# Altium PCB SLAVE.PcbDoc
Units mm, origin at the board's own origin, x right, y up, seen from the top; angles counter-clockwise.
Board outline 72.82 x 68.97 mm, 2 copper layers (Top Layer, Bottom Layer); 59 components, 52 nets, 222 pads, 42 vias.
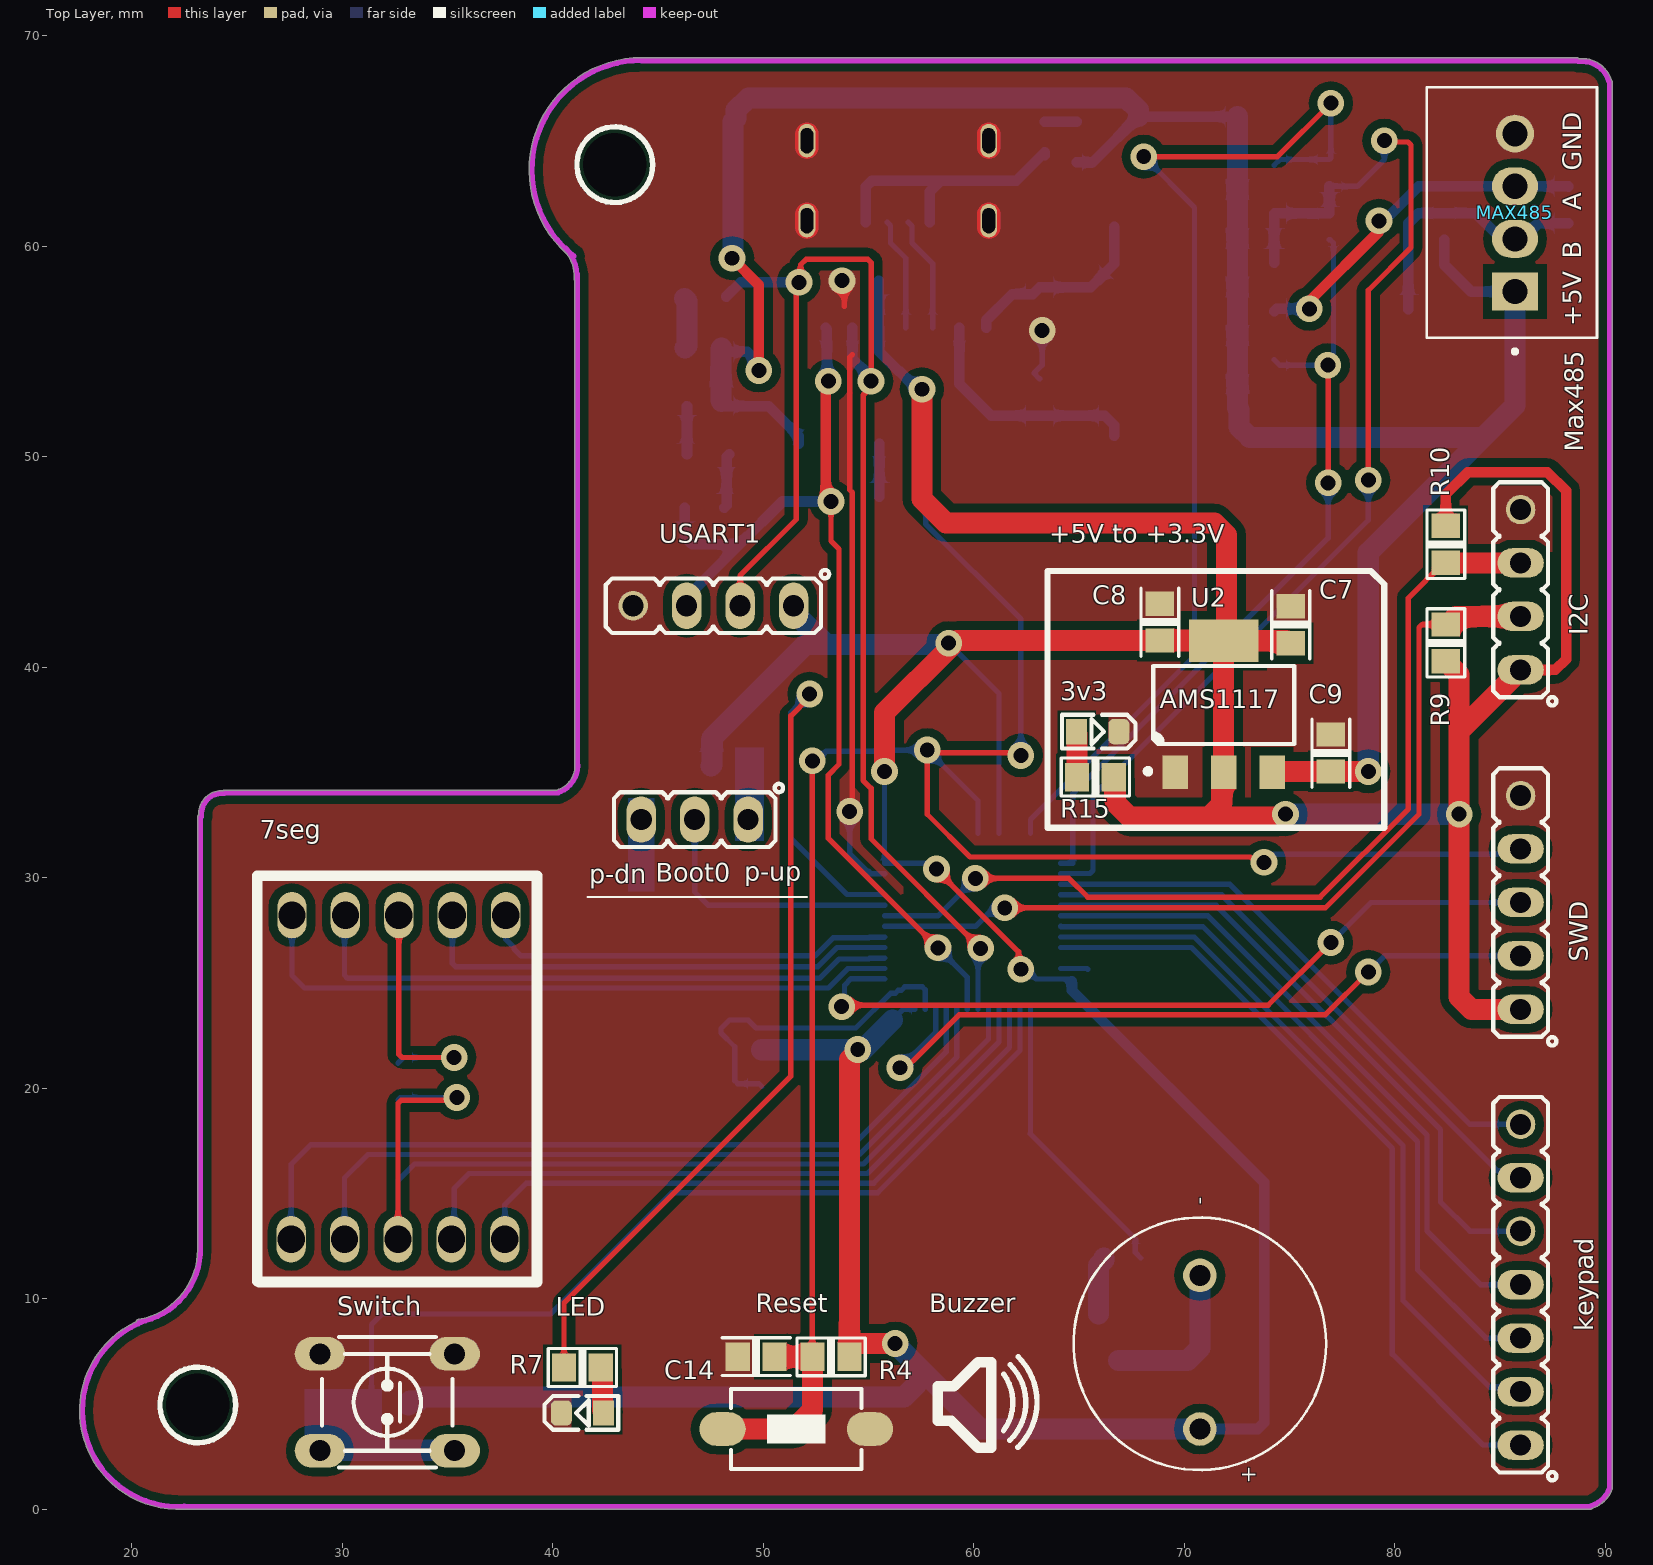
[diagram p0: Top Layer view]
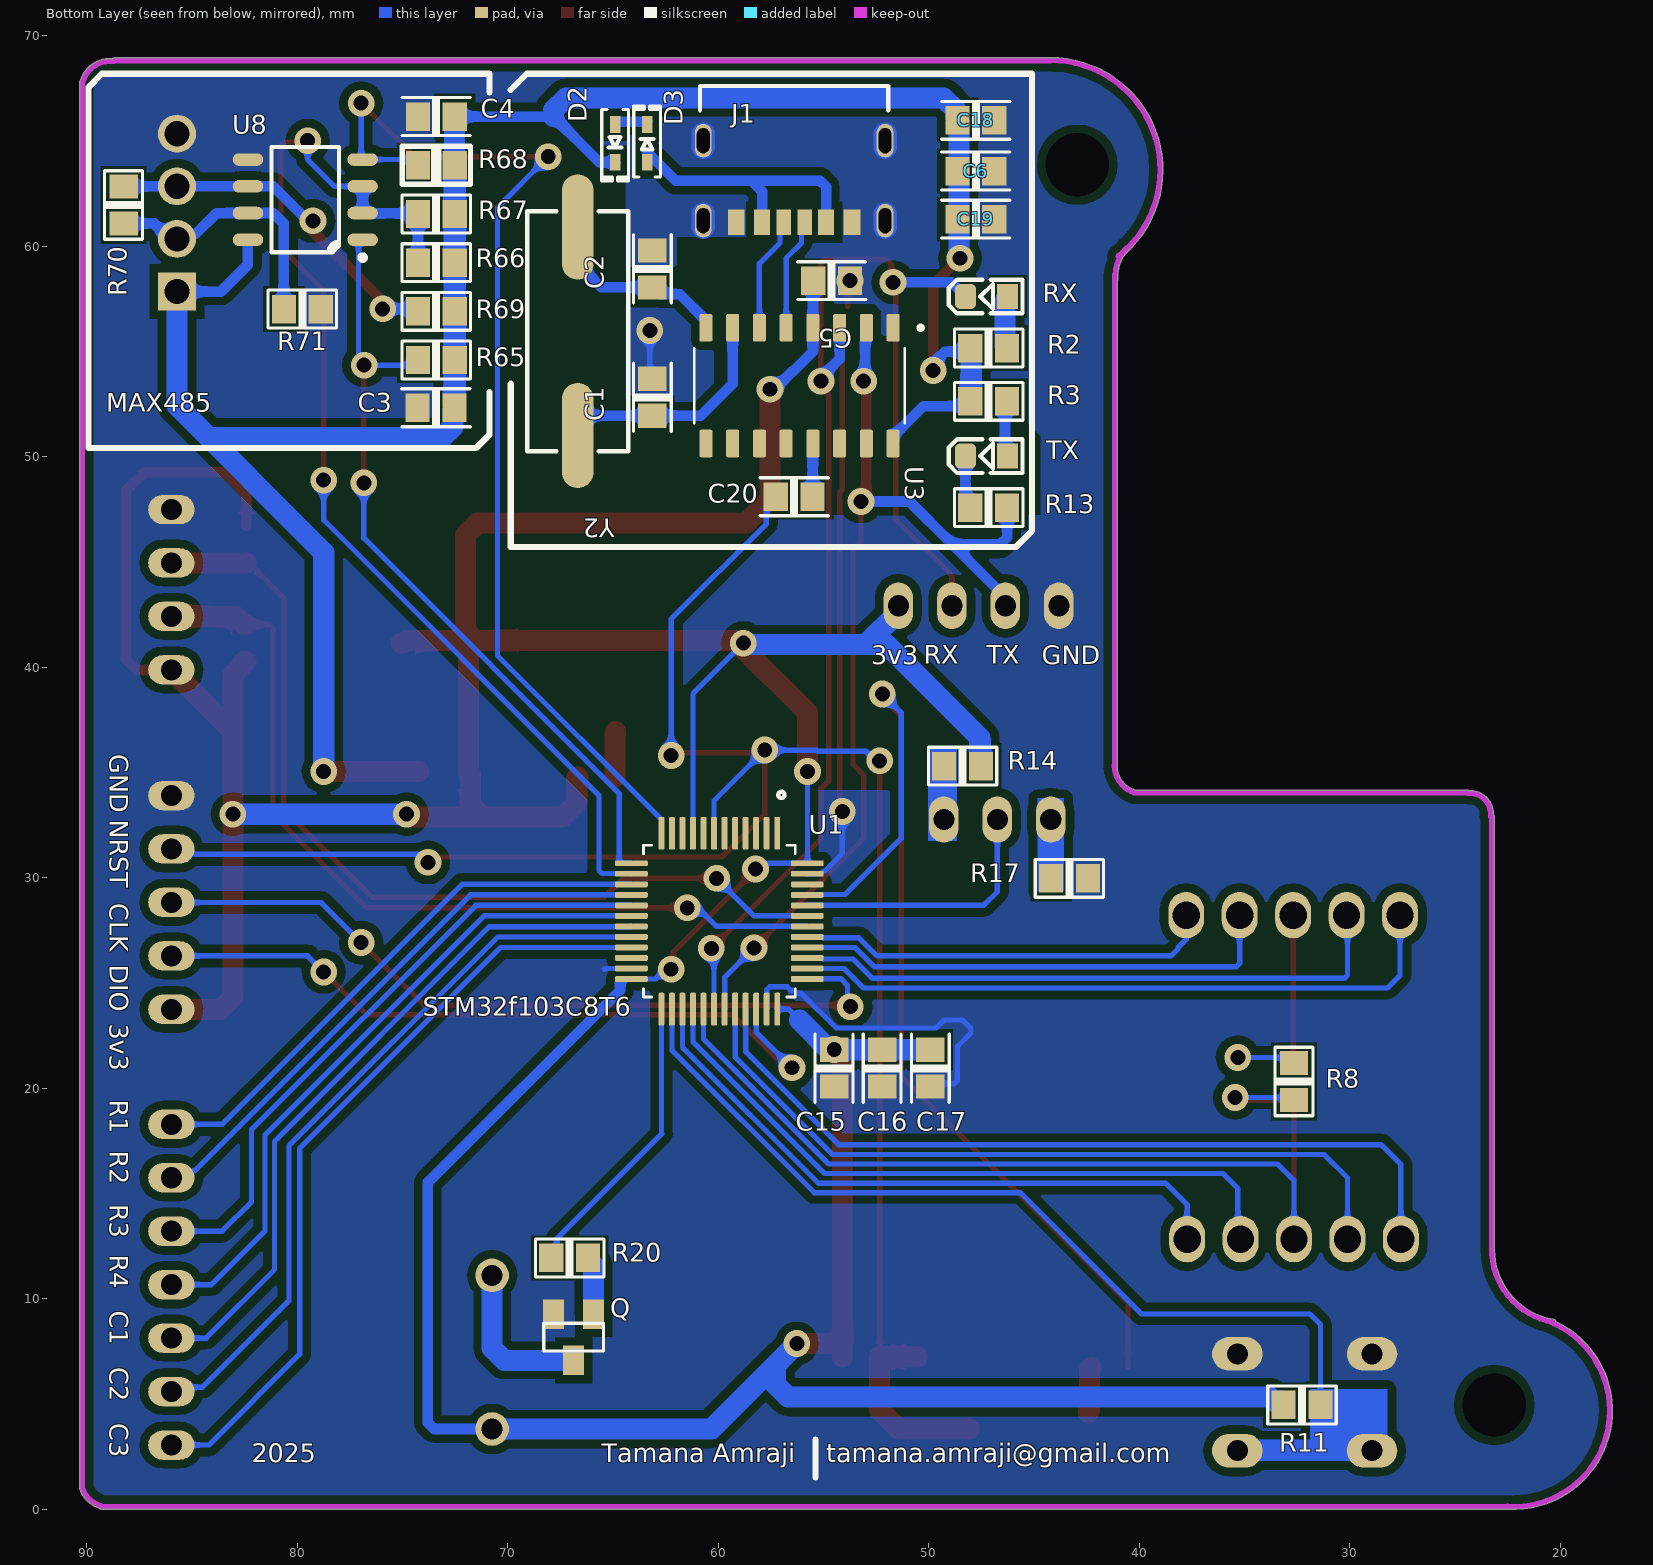
[diagram p1: Bottom Layer view, seen from below]
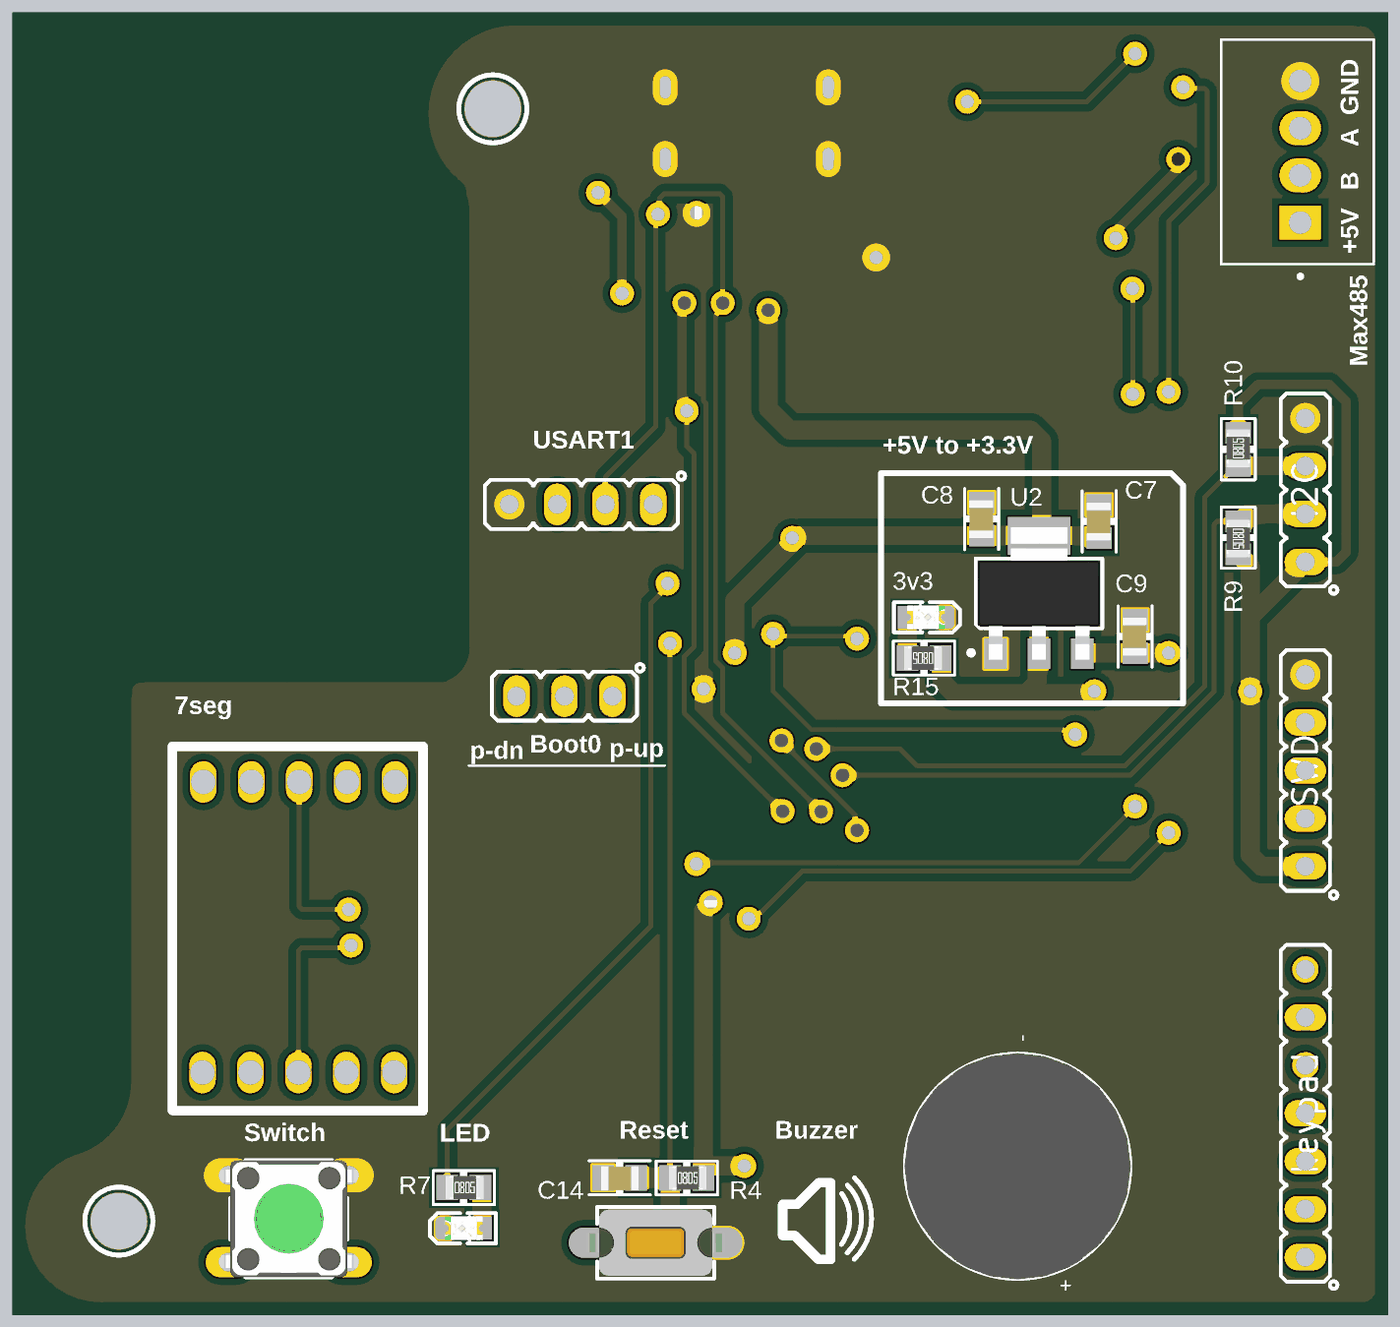
[diagram p2: 3D render of the assembled board from above, using the file's embedded part models]
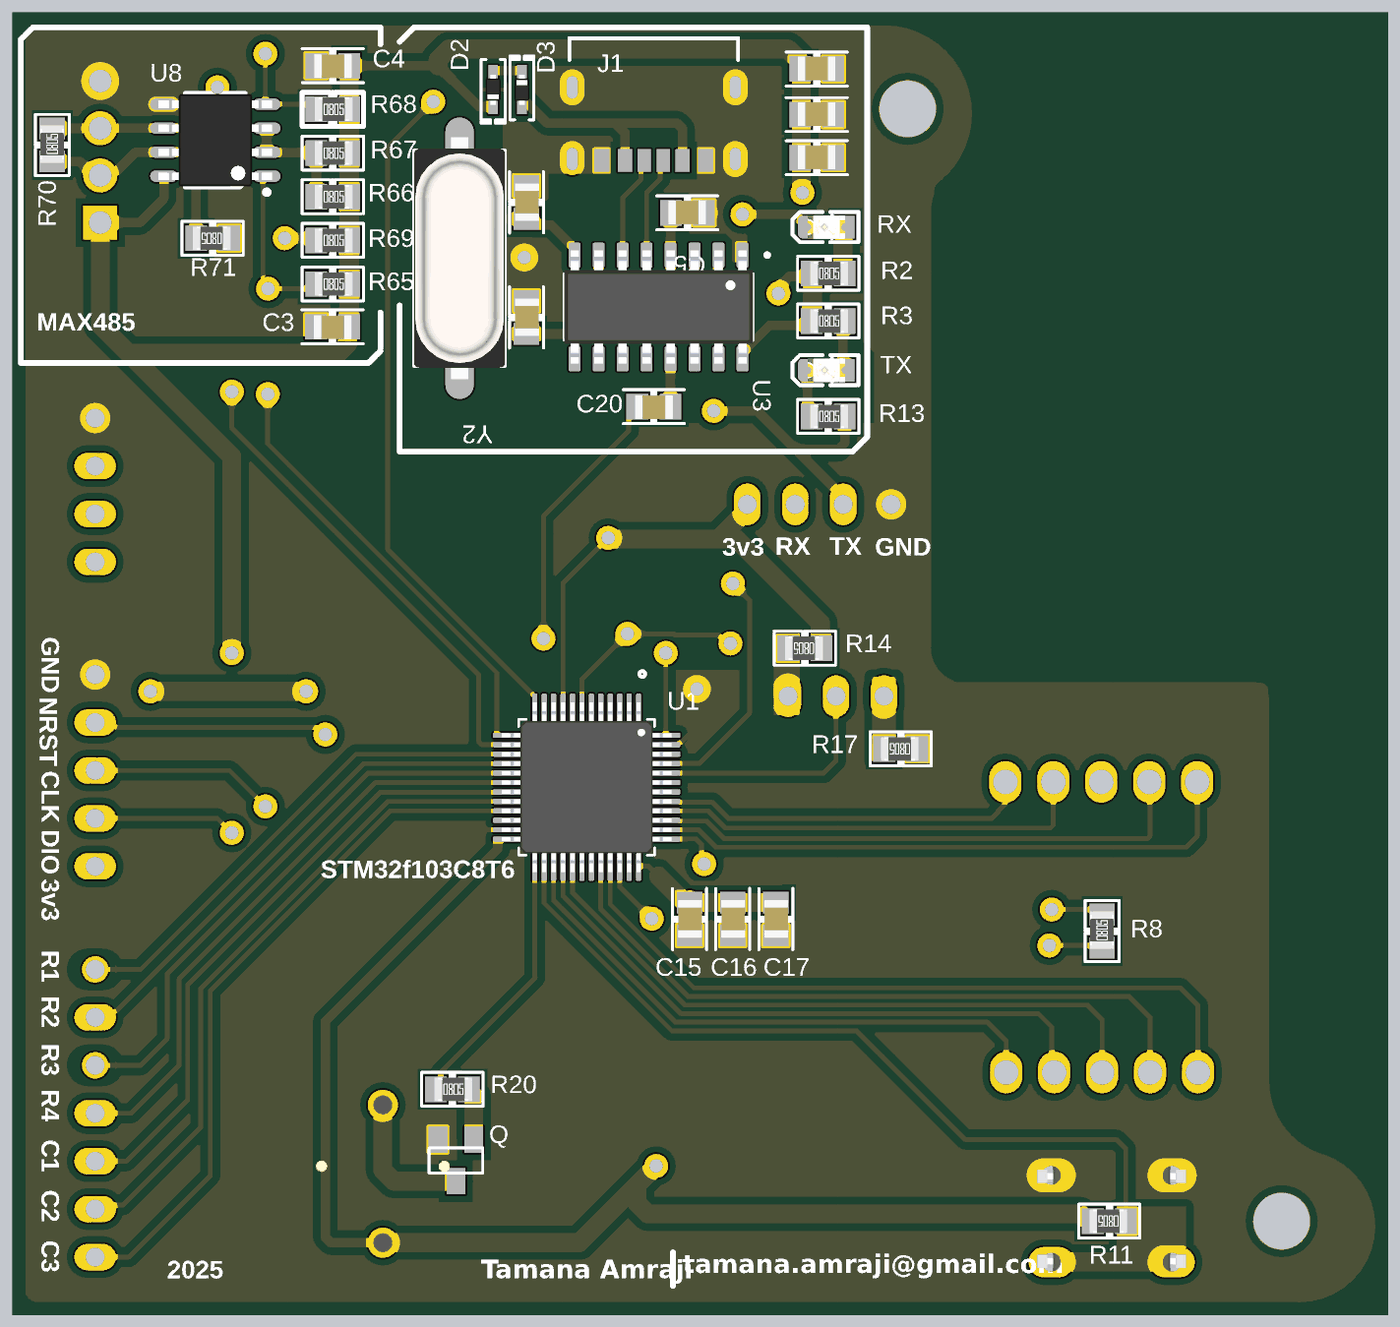
[diagram p3: 3D render of the assembled board from below, using the file's embedded part models]

## Layer stack, top to bottom
Top Solder: solder mask 0.0102, Solder Resist, Dk 3.5
Top Layer: signal copper 0.0356
Dielectric 1: dielectric 0.32, FR-4, Dk 4.8
Bottom Layer: signal copper 0.0356
Bottom Solder: solder mask 0.0102, Solder Resist, Dk 3.5

## Board outline
20.201,8.915 ccw(c22.193,4.679) 22.442,0.005 ccw(c22.479,0.127) 22.479,0 89.295,0 ccw(c89.295,0.127) 89.396,0.05 ccw(c88.941,1.445) 90.329,0.966 ccw(c90.208,1.008) 90.336,1.008 90.336,67.794 ccw(c90.208,67.794) 90.297,67.885 ccw(c88.893,67.457) 88.749,68.918 ccw(c88.66,68.827) 88.66,68.955 44.272,68.955 ccw(c44.218,68.839) 44.219,68.966 ccw(c44.208,63.632) 40.66,59.648 cw(c39.152,58.538) 41.024,58.538 cw(c39.152,58.538) 41.021,58.428 ccw(c41.148,58.42) 41.034,58.362 41.034,35.498 ccw(c41.162,35.498) 41.036,35.481 cw(c39.832,35.327) 41.045,35.327 cw(c39.832,35.327) 40.175,34.164 24.39,34.164 ccw(c24.39,34.036) 24.319,34.142 ccw(c24.281,33.03) 23.169,32.987 ccw(c23.255,32.893) 23.127,32.893 23.127,12.49 ccw(c23.246,12.442) 23.118,12.439 cw(c19.747,12.343) 23.12,12.343 cw(c19.747,12.343) 20.61,9.082 ccw(c20.636,8.958) 20.598,9.079 cw(c19.747,12.343) 20.306,9.017 ccw(c20.327,8.891)

## Design rules (kind name [scope] priority, off if disabled: settings)
Clearance [All] p1: gap=0.4 ignorepadtopadclearanceinfootprint=TRUE except(0: Arc-Hole Track-Hole SMDPad-Hole THPad-Hole Via-Hole Fill-Hole Text-Hole; 0.1: Arc-Track Arc-SMDPad Track-Track Track-SMDPad SMDPad-SMDPad; 0.2: Arc-Arc Arc-THPad Track-THPad; 0.254: Arc-Via Arc-Text Track-Via Track-Text SMDPad-THPad SMDPad-Via SMDPad-Text THPad-THPad THPad-Via THPad-Text Via-Via Via-Text Fill-Text Poly-Text Region-Text Text-Text)
HoleSize [All] p1: absolutevalues=TRUE maxlimit=5 minlimit=0.025 maxpercent=80.000 minpercent=20.000
MinimumSolderMaskSliver [Not HasFootprint('QFP50P900X900X160-48N') And  Not HasFootprint('GCT_USB4125-GF-A_REVA2') vs Not HasFootprint('QFP50P900X900X160-48N') And  Not HasFootprint('GCT_USB4125-GF-A_REVA2')] p1: minsoldermaskwidth=0.254
PolygonConnect [All] p1: connectstyle=Direct reliefconductorwidth=0.254 reliefentries=4 polygonreliefangle="90 Angle" airgapwidth=0.254
RoomDefinition Buzzer [InComponentClass('Buzzer')] p1: confinementstyle=ConfineIn formatcopy=TRUE lockcomponents=FALSE outline 63.119,0.445 78.232,0.445 78.232,15.177 63.119,15.177
RoomDefinition "Supply 5V to 3V3- Ams1117" [InComponentClass('Supply 5V to 3V3- Ams1117')] p2: confinementstyle=ConfineIn formatcopy=TRUE lockcomponents=FALSE outline 78.73,32.117 78.73,44.563 63.49,44.563 63.49,32.117
RoomDefinition CH340G [InComponentClass('CH340G')] p3: confinementstyle=ConfineIn formatcopy=TRUE lockcomponents=FALSE outline 44.831,46.189 70.485,46.189 70.485,68.531 44.831,68.531
RoomDefinition MAX485 [InComponentClass('MAX485')] p4: confinementstyle=ConfineIn formatcopy=TRUE lockcomponents=FALSE outline 90.17,50.79 90.17,68.49 71.106,68.49 71.106,50.79
RoutingVias [All] p1: holewidth=0.711 width=1.27 viastyle="Through Hole" minholewidth=0.711 minwidth=1.27 maxholewidth=0.711 maxwidth=1.27
SilkToSolderMaskClearance [All] p1 off: minsilkscreentomaskgap=0.1 clearancetoexposedcopper=TRUE
SolderMaskExpansion [All] p1: expansion=0.102 istentingtop=FALSE
Width [All] p1: maxlimit=1 minlimit=0.254 preferedwidth=0.5 minimp=50.000000 maximp=50.000000 favimp=50.000000
27 further rules are at their usual default settings.

## Classes and differential pairs
component class Slave_Micro: 7seg Boot0 C14 C15 C16 C17 I2C keypad LED R4 R7 R8 R9 R10 R11 R14 R17 Reset SWD Switch U1 USART1
component class Buzzer: Buzzer Q R20
component class "Supply 5V to 3V3- Ams1117": 3v3 C7 C8 C9 R15 U2
component class MAX485: C3 C4 MAX485 R65 R66 R67 R68 R69 R70 R71 U8
component class CH340G: C1 C2 C5 C6 C18 C19 C20 D2 D3 J1 R2 R3 R13 RX TX U3 Y2

## Components (designator, comment, footprint, x,y, rotation, side; value= is the part's Value field where it differs from the comment)
3v3 "LED SMD 0805 GREEN" LED_0805_GREEN 65.887,36.943 r0 top
7seg "7seg" "7seg 12x19" 22.733,9.525 r0 top
Boot0 "HDRM3" HDR_1X3 46.736,32.766 r180 top
Buzzer "CEM-1203(42)" CUI_CEM-1203(42) 70.739,7.86 r90 top
C1 "22pF" "CAP 0805_2012" 63.119,52.832 r90 bottom value=100nF
C2 "22pF" "CAP 0805_2012" 63.119,58.928 r90 bottom value=100nF
C3 "10uF" "CAP 0805_2012" 73.406,52.324 r180 bottom
C4 "100nF" "CAP 0805_2012" 73.392,66.157 r180 bottom
C5 "100nF" "CAP 0805_2012" 54.61,58.381 r0 bottom
C6 "10uF" "CAP 0805_2012" 47.752,63.588 r0 bottom value=100nF
C7 "10uF" "CAP 0805_2012" 75.047,42.023 r270 top
C8 "100nF" "CAP 0805_2012" 68.824,42.15 r270 top
C9 "10uF" "CAP 0805_2012" 76.952,35.927 r270 top
C14 "100nF" "CAP 0805_2012" 49.657,7.239 r0 top
C15 "100nF" "CAP 0805_2012" 54.483,20.955 r90 bottom
C16 "100nF" "CAP 0805_2012" 52.197,20.955 r90 bottom
C17 "100nF" "CAP 0805_2012" 49.911,20.955 r90 bottom
C18 "100nF" "CAP 0805_2012" 47.752,66.001 r0 bottom
C19 "100nF" "CAP 0805_2012" 47.752,61.302 r0 bottom
C20 "100nF" "CAP 0805_2012" 56.388,48.094 r180 bottom
D2 "1N4148" SOD-523F 64.897,64.897 r270 bottom
D3 "1N4148" SOD-523F 63.373,64.897 r90 bottom
I2C "HDR1X4" HDR_1X4 85.979,43.688 r90 top value=HDRM4
J1 "USB4125-GF-A_REVA2" GCT_USB4125-GF-A_REVA2 56.388,64.223 r0 bottom
keypad "HDR1X7" HDR_1X7 85.979,10.668 r90 top value=HDRM7
LED "LED SMD 0805 GREEN" LED_0805_GREEN 41.402,4.572 r180 top
MAX485 "phoenix 2.54" PHOENIX_1881574 89.611,55.655 r90 top
Q "MMBT2222A" SOT23 66.868,8.171 r0 bottom
R2 "1.5k" "RES 0805_2012" 47.145,55.167 r180 bottom value=1K
R3 "1.5k" "RES 0805_2012" 47.145,52.64 r180 bottom value=1K
R4 "10K" "RES 0805_2012" 53.213,7.239 r0 top value=1K
R7 "330" "RES 0805_2012" 41.402,6.731 r0 top value=1K
R8 "330" "RES 0805_2012" 32.639,20.32 r90 bottom value=1K
R9 "10K" "RES 0805_2012" 82.423,41.162 r270 top value=1K
R10 "10K" "RES 0805_2012" 82.423,45.847 r90 top value=1K
R11 "10K" "RES 0805_2012" 32.258,4.953 r0 bottom value=1K
R13 "1.5k" "RES 0805_2012" 47.145,47.586 r180 bottom value=1K
R14 "10k" "RES 0805_2012" 48.387,35.306 r0 bottom value=1K
R15 "330" "RES 0805_2012" 65.776,34.784 r180 top value=1K
R17 "10k" "RES 0805_2012" 43.307,29.972 r0 bottom value=1K
R20 "10K" "RES 0805_2012" 67.056,11.938 r180 bottom value=1K
R65 "10k" "RES 0805_2012" 73.392,54.6 r180 bottom value=1K
R66 "10k" "RES 0805_2012" 73.392,59.227 r180 bottom value=1K
R67 "10k" "RES 0805_2012" 73.392,61.54 r180 bottom value=1K
R68 "10k" "RES 0805_2012" 73.392,63.854 r180 bottom value=1K
R69 "20k" "RES 0805_2012" 73.392,56.913 r180 bottom value=1K
R70 "120" "RES 0805_2012" 88.251,61.966 r90 bottom value=1K
R71 "20k" "RES 0805_2012" 79.756,57.023 r0 bottom value=1K
Reset "Tactile 2PIN 6X3.5mm H4.57mm (SMD)" SWPBS_SPST_6X3X5 51.562,3.81 r180 top
RX "LED SMD 0805 GREEN" LED_0805_GREEN 47.244,57.619 r0 bottom
SWD "HDR1X5" HDR_1X5 85.979,28.829 r90 top value=HDRM5
Switch "Tactile 4PIN 6X6mm H5mm (THD)" SWPBT_SPDT_6X6X5SKHH 32.131,5.08 r180 top
TX "LED SMD 0805 GREEN" LED_0805_GREEN 47.244,50.038 r0 bottom
U1 "STM32F103C8T6" QFP50P900X900X160-48N 59.944,27.94 r270 bottom
U2 "LD1117-3.3V" "SOT-223-4 6.5X7MM P2.3MM" 71.872,38.213 r90 top
U3 "CH340G" SOIC127P600X180-16N 56.134,53.384 r270 bottom
U8 "ADM485" "SOIC-8 4.9X3.9MM P1.27MM" 79.615,62.22 r0 bottom
USART1 "HDR1X4" HDR_1X4 47.625,42.926 r180 top value=HDRM4
Y2 "12MHz" "HC-49S SMD" 66.675,55.968 r270 bottom

## Footprints (in the part's own frame and the unit in brackets; to place one, negate y for a bottom-side part, rotate by r counter-clockwise, add the part's x,y. Pads: shape width x height; smd on the part's side, far side on the other; paste and mask are expansions set on the pad)
"7seg 12x19" [mm]
  oval 1.4x2.2 / inner round 1.4 / far side oval 1.7x2.2 hole 1.3 mask+0.1: 1(4.87,18.697) 2(7.41,18.697) 3(9.95,18.697) 4(12.49,18.697) 5(15.03,18.697) 6(14.986,3.302) 7(12.446,3.302) 8(9.906,3.302) 9(7.366,3.302) 10(4.826,3.302)
  silkscreen extent 3.23,1.27 16.51,20.57
"CAP 0805_2012" [mm] "Chip Capacitor, 2-Leads, Body 2.00x1.20mm, IPC Medium Density"
  rect 1.15x1.35 smd: 1(-0.875,0.01) 2(0.875,0.01)
  silkscreen extent -1.62,-0.89 1.63,0.91, body extent -0.99,-0.65 1.01,0.62, height 1.26
CUI_CEM-1203(42) [mm]
  round 1.6 hole 1: N(3.25,0) P(-4.05,0)
  silkscreen extent -6,-6 6,6, body extent -6,-6 6,6, height 8.5
GCT_USB4125-GF-A_REVA2 [mm]
  rect 0.7x1.2 smd: A5(-0.5,3.08) B5(0.5,3.08)
  rect 0.76x1.2 smd: A9(1.52,3.08) B9(-1.52,3.08)
  rect 0.8x1.2 smd: A12(2.75,3.08) B12(-2.75,3.08)
  oval 0.8x1.6 hole 0.6 slot 1.2 at 90 deg mask+0: S1(-4.32,3) S2(4.32,3) S3(-4.32,-0.8) S4(4.32,-0.8)
  Top Layer region: 4.349,3.849 4.377,3.847 4.406,3.843 4.434,3.838 4.462,3.831 4.49,3.823 4.517,3.813 4.544,3.802 4.57,3.79 4.595,3.776 4.62,3.761 4.643,3.745 4.666,3.727 4.688,3.709 4.709,3.689 4.729,3.668 4.747,3.646 4.765,3.623 4.781,3.6 4.796,3.575 4.81,3.55 4.822,3.524 4.833,3.497 4.843,3.47 4.851,3.442 4.858,3.414 4.863,3.386 4.867,3.357 4.869,3.329 4.87,3.3 4.87,2.7 4.869,2.671 4.867,2.643 4.863,2.614 4.858,2.586 4.851,2.558 4.843,2.53 4.833,2.503 4.822,2.476 4.81,2.45 4.796,2.425 4.781,2.4 4.765,2.377 4.747,2.354 4.729,2.332 4.709,2.311 4.688,2.291 4.666,2.273 4.643,2.255 4.62,2.239 4.595,2.224 4.57,2.21 4.544,2.198 4.517,2.187 4.49,2.177 4.462,2.169 4.434,2.162 4.406,2.157 4.377,2.153 4.349,2.151 4.32,2.15 4.291,2.151 4.263,2.153 4.234,2.157 4.206,2.162 4.178,2.169 4.15,2.177 4.123,2.187 4.096,2.198 4.07,2.21 4.045,2.224 4.02,2.239 3.997,2.255 3.974,2.273 3.952,2.291 3.931,2.311 3.911,2.332 3.893,2.354 3.875,2.377 3.859,2.4 3.844,2.425 3.83,2.45 3.818,2.476 3.807,2.503 3.797,2.53 3.789,2.558 3.782,2.586 3.777,2.614 3.773,2.643 3.771,2.671 3.77,2.7 3.77,3.3 3.771,3.329 3.773,3.357 3.777,3.386 3.782,3.414 3.789,3.442 3.797,3.47 3.807,3.497 3.818,3.524 3.83,3.55 3.844,3.575 3.859,3.6 3.875,3.623 3.893,3.646 3.911,3.668 3.931,3.689 3.952,3.709 3.974,3.727 3.997,3.745 4.02,3.761 4.045,3.776 4.07,3.79 4.096,3.802 4.123,3.813 4.15,3.823 4.178,3.831 4.206,3.838 4.234,3.843 4.263,3.847 4.291,3.849 4.32,3.85
  Top Layer region: -4.291,3.849 -4.263,3.847 -4.234,3.843 -4.206,3.838 -4.178,3.831 -4.15,3.823 -4.123,3.813 -4.096,3.802 -4.07,3.79 -4.045,3.776 -4.02,3.761 -3.997,3.745 -3.974,3.727 -3.952,3.709 -3.931,3.689 -3.911,3.668 -3.893,3.646 -3.875,3.623 -3.859,3.6 -3.844,3.575 -3.83,3.55 -3.818,3.524 -3.807,3.497 -3.797,3.47 -3.789,3.442 -3.782,3.414 -3.777,3.386 -3.773,3.357 -3.771,3.329 -3.77,3.3 -3.77,2.7 -3.771,2.671 -3.773,2.643 -3.777,2.614 -3.782,2.586 -3.789,2.558 -3.797,2.53 -3.807,2.503 -3.818,2.476 -3.83,2.45 -3.844,2.425 -3.859,2.4 -3.875,2.377 -3.893,2.354 -3.911,2.332 -3.931,2.311 -3.952,2.291 -3.974,2.273 -3.997,2.255 -4.02,2.239 -4.045,2.224 -4.07,2.21 -4.096,2.198 -4.123,2.187 -4.15,2.177 -4.178,2.169 -4.206,2.162 -4.234,2.157 -4.263,2.153 -4.291,2.151 -4.32,2.15 -4.349,2.151 -4.377,2.153 -4.406,2.157 -4.434,2.162 -4.462,2.169 -4.49,2.177 -4.517,2.187 -4.544,2.198 -4.57,2.21 -4.595,2.224 -4.62,2.239 -4.643,2.255 -4.666,2.273 -4.688,2.291 -4.709,2.311 -4.729,2.332 -4.747,2.354 -4.765,2.377 -4.781,2.4 -4.796,2.425 -4.81,2.45 -4.822,2.476 -4.833,2.503 -4.843,2.53 -4.851,2.558 -4.858,2.586 -4.863,2.614 -4.867,2.643 -4.869,2.671 -4.87,2.7 -4.87,3.3 -4.869,3.329 -4.867,3.357 -4.863,3.386 -4.858,3.414 -4.851,3.442 -4.843,3.47 -4.833,3.497 -4.822,3.524 -4.81,3.55 -4.796,3.575 -4.781,3.6 -4.765,3.623 -4.747,3.646 -4.729,3.668 -4.709,3.689 -4.688,3.709 -4.666,3.727 -4.643,3.745 -4.62,3.761 -4.595,3.776 -4.57,3.79 -4.544,3.802 -4.517,3.813 -4.49,3.823 -4.462,3.831 -4.434,3.838 -4.406,3.843 -4.377,3.847 -4.349,3.849 -4.32,3.85
  Top Layer region: 4.349,0.049 4.377,0.047 4.406,0.043 4.434,0.038 4.462,0.031 4.49,0.023 4.517,0.013 4.544,0.002 4.57,-0.01 4.595,-0.024 4.62,-0.039 4.643,-0.055 4.666,-0.073 4.688,-0.091 4.709,-0.111 4.729,-0.132 4.747,-0.154 4.765,-0.177 4.781,-0.2 4.796,-0.225 4.81,-0.25 4.822,-0.276 4.833,-0.303 4.843,-0.33 4.851,-0.358 4.858,-0.386 4.863,-0.414 4.867,-0.443 4.869,-0.471 4.87,-0.5 4.87,-1.1 4.869,-1.129 4.867,-1.157 4.863,-1.186 4.858,-1.214 4.851,-1.242 4.843,-1.27 4.833,-1.297 4.822,-1.324 4.81,-1.35 4.796,-1.375 4.781,-1.4 4.765,-1.423 4.747,-1.446 4.729,-1.468 4.709,-1.489 4.688,-1.509 4.666,-1.527 4.643,-1.545 4.62,-1.561 4.595,-1.576 4.57,-1.59 4.544,-1.602 4.517,-1.613 4.49,-1.623 4.462,-1.631 4.434,-1.638 4.406,-1.643 4.377,-1.647 4.349,-1.649 4.32,-1.65 4.291,-1.649 4.263,-1.647 4.234,-1.643 4.206,-1.638 4.178,-1.631 4.15,-1.623 4.123,-1.613 4.096,-1.602 4.07,-1.59 4.045,-1.576 4.02,-1.561 3.997,-1.545 3.974,-1.527 3.952,-1.509 3.931,-1.489 3.911,-1.468 3.893,-1.446 3.875,-1.423 3.859,-1.4 3.844,-1.375 3.83,-1.35 3.818,-1.324 3.807,-1.297 3.797,-1.27 3.789,-1.242 3.782,-1.214 3.777,-1.186 3.773,-1.157 3.771,-1.129 3.77,-1.1 3.77,-0.5 3.771,-0.471 3.773,-0.443 3.777,-0.414 3.782,-0.386 3.789,-0.358 3.797,-0.33 3.807,-0.303 3.818,-0.276 3.83,-0.25 3.844,-0.225 3.859,-0.2 3.875,-0.177 3.893,-0.154 3.911,-0.132 3.931,-0.111 3.952,-0.091 3.974,-0.073 3.997,-0.055 4.02,-0.039 4.045,-0.024 4.07,-0.01 4.096,0.002 4.123,0.013 4.15,0.023 4.178,0.031 4.206,0.038 4.234,0.043 4.263,0.047 4.291,0.049 4.32,0.05
  Top Layer region: -4.291,0.049 -4.263,0.047 -4.234,0.043 -4.206,0.038 -4.178,0.031 -4.15,0.023 -4.123,0.013 -4.096,0.002 -4.07,-0.01 -4.045,-0.024 -4.02,-0.039 -3.997,-0.055 -3.974,-0.073 -3.952,-0.091 -3.931,-0.111 -3.911,-0.132 -3.893,-0.154 -3.875,-0.177 -3.859,-0.2 -3.844,-0.225 -3.83,-0.25 -3.818,-0.276 -3.807,-0.303 -3.797,-0.33 -3.789,-0.358 -3.782,-0.386 -3.777,-0.414 -3.773,-0.443 -3.771,-0.471 -3.77,-0.5 -3.77,-1.1 -3.771,-1.129 -3.773,-1.157 -3.777,-1.186 -3.782,-1.214 -3.789,-1.242 -3.797,-1.27 -3.807,-1.297 -3.818,-1.324 -3.83,-1.35 -3.844,-1.375 -3.859,-1.4 -3.875,-1.423 -3.893,-1.446 -3.911,-1.468 -3.931,-1.489 -3.952,-1.509 -3.974,-1.527 -3.997,-1.545 -4.02,-1.561 -4.045,-1.576 -4.07,-1.59 -4.096,-1.602 -4.123,-1.613 -4.15,-1.623 -4.178,-1.631 -4.206,-1.638 -4.234,-1.643 -4.263,-1.647 -4.291,-1.649 -4.32,-1.65 -4.349,-1.649 -4.377,-1.647 -4.406,-1.643 -4.434,-1.638 -4.462,-1.631 -4.49,-1.623 -4.517,-1.613 -4.544,-1.602 -4.57,-1.59 -4.595,-1.576 -4.62,-1.561 -4.643,-1.545 -4.666,-1.527 -4.688,-1.509 -4.709,-1.489 -4.729,-1.468 -4.747,-1.446 -4.765,-1.423 -4.781,-1.4 -4.796,-1.375 -4.81,-1.35 -4.822,-1.324 -4.833,-1.297 -4.843,-1.27 -4.851,-1.242 -4.858,-1.214 -4.863,-1.186 -4.867,-1.157 -4.869,-1.129 -4.87,-1.1 -4.87,-0.5 -4.869,-0.471 -4.867,-0.443 -4.863,-0.414 -4.858,-0.386 -4.851,-0.358 -4.843,-0.33 -4.833,-0.303 -4.822,-0.276 -4.81,-0.25 -4.796,-0.225 -4.781,-0.2 -4.765,-0.177 -4.747,-0.154 -4.729,-0.132 -4.709,-0.111 -4.688,-0.091 -4.666,-0.073 -4.643,-0.055 -4.62,-0.039 -4.595,-0.024 -4.57,-0.01 -4.544,0.002 -4.517,0.013 -4.49,0.023 -4.462,0.031 -4.434,0.038 -4.406,0.043 -4.377,0.047 -4.349,0.049 -4.32,0.05
  Bottom Layer region: 4.349,3.849 4.377,3.847 4.406,3.843 4.434,3.838 4.462,3.831 4.49,3.823 4.517,3.813 4.544,3.802 4.57,3.79 4.595,3.776 4.62,3.761 4.643,3.745 4.666,3.727 4.688,3.709 4.709,3.689 4.729,3.668 4.747,3.646 4.765,3.623 4.781,3.6 4.796,3.575 4.81,3.55 4.822,3.524 4.833,3.497 4.843,3.47 4.851,3.442 4.858,3.414 4.863,3.386 4.867,3.357 4.869,3.329 4.87,3.3 4.87,2.7 4.869,2.671 4.867,2.643 4.863,2.614 4.858,2.586 4.851,2.558 4.843,2.53 4.833,2.503 4.822,2.476 4.81,2.45 4.796,2.425 4.781,2.4 4.765,2.377 4.747,2.354 4.729,2.332 4.709,2.311 4.688,2.291 4.666,2.273 4.643,2.255 4.62,2.239 4.595,2.224 4.57,2.21 4.544,2.198 4.517,2.187 4.49,2.177 4.462,2.169 4.434,2.162 4.406,2.157 4.377,2.153 4.349,2.151 4.32,2.15 4.291,2.151 4.263,2.153 4.234,2.157 4.206,2.162 4.178,2.169 4.15,2.177 4.123,2.187 4.096,2.198 4.07,2.21 4.045,2.224 4.02,2.239 3.997,2.255 3.974,2.273 3.952,2.291 3.931,2.311 3.911,2.332 3.893,2.354 3.875,2.377 3.859,2.4 3.844,2.425 3.83,2.45 3.818,2.476 3.807,2.503 3.797,2.53 3.789,2.558 3.782,2.586 3.777,2.614 3.773,2.643 3.771,2.671 3.77,2.7 3.77,3.3 3.771,3.329 3.773,3.357 3.777,3.386 3.782,3.414 3.789,3.442 3.797,3.47 3.807,3.497 3.818,3.524 3.83,3.55 3.844,3.575 3.859,3.6 3.875,3.623 3.893,3.646 3.911,3.668 3.931,3.689 3.952,3.709 3.974,3.727 3.997,3.745 4.02,3.761 4.045,3.776 4.07,3.79 4.096,3.802 4.123,3.813 4.15,3.823 4.178,3.831 4.206,3.838 4.234,3.843 4.263,3.847 4.291,3.849 4.32,3.85
  Bottom Layer region: -4.291,3.849 -4.263,3.847 -4.234,3.843 -4.206,3.838 -4.178,3.831 -4.15,3.823 -4.123,3.813 -4.096,3.802 -4.07,3.79 -4.045,3.776 -4.02,3.761 -3.997,3.745 -3.974,3.727 -3.952,3.709 -3.931,3.689 -3.911,3.668 -3.893,3.646 -3.875,3.623 -3.859,3.6 -3.844,3.575 -3.83,3.55 -3.818,3.524 -3.807,3.497 -3.797,3.47 -3.789,3.442 -3.782,3.414 -3.777,3.386 -3.773,3.357 -3.771,3.329 -3.77,3.3 -3.77,2.7 -3.771,2.671 -3.773,2.643 -3.777,2.614 -3.782,2.586 -3.789,2.558 -3.797,2.53 -3.807,2.503 -3.818,2.476 -3.83,2.45 -3.844,2.425 -3.859,2.4 -3.875,2.377 -3.893,2.354 -3.911,2.332 -3.931,2.311 -3.952,2.291 -3.974,2.273 -3.997,2.255 -4.02,2.239 -4.045,2.224 -4.07,2.21 -4.096,2.198 -4.123,2.187 -4.15,2.177 -4.178,2.169 -4.206,2.162 -4.234,2.157 -4.263,2.153 -4.291,2.151 -4.32,2.15 -4.349,2.151 -4.377,2.153 -4.406,2.157 -4.434,2.162 -4.462,2.169 -4.49,2.177 -4.517,2.187 -4.544,2.198 -4.57,2.21 -4.595,2.224 -4.62,2.239 -4.643,2.255 -4.666,2.273 -4.688,2.291 -4.709,2.311 -4.729,2.332 -4.747,2.354 -4.765,2.377 -4.781,2.4 -4.796,2.425 -4.81,2.45 -4.822,2.476 -4.833,2.503 -4.843,2.53 -4.851,2.558 -4.858,2.586 -4.863,2.614 -4.867,2.643 -4.869,2.671 -4.87,2.7 -4.87,3.3 -4.869,3.329 -4.867,3.357 -4.863,3.386 -4.858,3.414 -4.851,3.442 -4.843,3.47 -4.833,3.497 -4.822,3.524 -4.81,3.55 -4.796,3.575 -4.781,3.6 -4.765,3.623 -4.747,3.646 -4.729,3.668 -4.709,3.689 -4.688,3.709 -4.666,3.727 -4.643,3.745 -4.62,3.761 -4.595,3.776 -4.57,3.79 -4.544,3.802 -4.517,3.813 -4.49,3.823 -4.462,3.831 -4.434,3.838 -4.406,3.843 -4.377,3.847 -4.349,3.849 -4.32,3.85
  Bottom Layer region: 4.349,0.049 4.377,0.047 4.406,0.043 4.434,0.038 4.462,0.031 4.49,0.023 4.517,0.013 4.544,0.002 4.57,-0.01 4.595,-0.024 4.62,-0.039 4.643,-0.055 4.666,-0.073 4.688,-0.091 4.709,-0.111 4.729,-0.132 4.747,-0.154 4.765,-0.177 4.781,-0.2 4.796,-0.225 4.81,-0.25 4.822,-0.276 4.833,-0.303 4.843,-0.33 4.851,-0.358 4.858,-0.386 4.863,-0.414 4.867,-0.443 4.869,-0.471 4.87,-0.5 4.87,-1.1 4.869,-1.129 4.867,-1.157 4.863,-1.186 4.858,-1.214 4.851,-1.242 4.843,-1.27 4.833,-1.297 4.822,-1.324 4.81,-1.35 4.796,-1.375 4.781,-1.4 4.765,-1.423 4.747,-1.446 4.729,-1.468 4.709,-1.489 4.688,-1.509 4.666,-1.527 4.643,-1.545 4.62,-1.561 4.595,-1.576 4.57,-1.59 4.544,-1.602 4.517,-1.613 4.49,-1.623 4.462,-1.631 4.434,-1.638 4.406,-1.643 4.377,-1.647 4.349,-1.649 4.32,-1.65 4.291,-1.649 4.263,-1.647 4.234,-1.643 4.206,-1.638 4.178,-1.631 4.15,-1.623 4.123,-1.613 4.096,-1.602 4.07,-1.59 4.045,-1.576 4.02,-1.561 3.997,-1.545 3.974,-1.527 3.952,-1.509 3.931,-1.489 3.911,-1.468 3.893,-1.446 3.875,-1.423 3.859,-1.4 3.844,-1.375 3.83,-1.35 3.818,-1.324 3.807,-1.297 3.797,-1.27 3.789,-1.242 3.782,-1.214 3.777,-1.186 3.773,-1.157 3.771,-1.129 3.77,-1.1 3.77,-0.5 3.771,-0.471 3.773,-0.443 3.777,-0.414 3.782,-0.386 3.789,-0.358 3.797,-0.33 3.807,-0.303 3.818,-0.276 3.83,-0.25 3.844,-0.225 3.859,-0.2 3.875,-0.177 3.893,-0.154 3.911,-0.132 3.931,-0.111 3.952,-0.091 3.974,-0.073 3.997,-0.055 4.02,-0.039 4.045,-0.024 4.07,-0.01 4.096,0.002 4.123,0.013 4.15,0.023 4.178,0.031 4.206,0.038 4.234,0.043 4.263,0.047 4.291,0.049 4.32,0.05
  Bottom Layer region: -4.291,0.049 -4.263,0.047 -4.234,0.043 -4.206,0.038 -4.178,0.031 -4.15,0.023 -4.123,0.013 -4.096,0.002 -4.07,-0.01 -4.045,-0.024 -4.02,-0.039 -3.997,-0.055 -3.974,-0.073 -3.952,-0.091 -3.931,-0.111 -3.911,-0.132 -3.893,-0.154 -3.875,-0.177 -3.859,-0.2 -3.844,-0.225 -3.83,-0.25 -3.818,-0.276 -3.807,-0.303 -3.797,-0.33 -3.789,-0.358 -3.782,-0.386 -3.777,-0.414 -3.773,-0.443 -3.771,-0.471 -3.77,-0.5 -3.77,-1.1 -3.771,-1.129 -3.773,-1.157 -3.777,-1.186 -3.782,-1.214 -3.789,-1.242 -3.797,-1.27 -3.807,-1.297 -3.818,-1.324 -3.83,-1.35 -3.844,-1.375 -3.859,-1.4 -3.875,-1.423 -3.893,-1.446 -3.911,-1.468 -3.931,-1.489 -3.952,-1.509 -3.974,-1.527 -3.997,-1.545 -4.02,-1.561 -4.045,-1.576 -4.07,-1.59 -4.096,-1.602 -4.123,-1.613 -4.15,-1.623 -4.178,-1.631 -4.206,-1.638 -4.234,-1.643 -4.263,-1.647 -4.291,-1.649 -4.32,-1.65 -4.349,-1.649 -4.377,-1.647 -4.406,-1.643 -4.434,-1.638 -4.462,-1.631 -4.49,-1.623 -4.517,-1.613 -4.544,-1.602 -4.57,-1.59 -4.595,-1.576 -4.62,-1.561 -4.643,-1.545 -4.666,-1.527 -4.688,-1.509 -4.709,-1.489 -4.729,-1.468 -4.747,-1.446 -4.765,-1.423 -4.781,-1.4 -4.796,-1.375 -4.81,-1.35 -4.822,-1.324 -4.833,-1.297 -4.843,-1.27 -4.851,-1.242 -4.858,-1.214 -4.863,-1.186 -4.867,-1.157 -4.869,-1.129 -4.87,-1.1 -4.87,-0.5 -4.869,-0.471 -4.867,-0.443 -4.863,-0.414 -4.858,-0.386 -4.851,-0.358 -4.843,-0.33 -4.833,-0.303 -4.822,-0.276 -4.81,-0.25 -4.796,-0.225 -4.781,-0.2 -4.765,-0.177 -4.747,-0.154 -4.729,-0.132 -4.709,-0.111 -4.688,-0.091 -4.666,-0.073 -4.643,-0.055 -4.62,-0.039 -4.595,-0.024 -4.57,-0.01 -4.544,0.002 -4.517,0.013 -4.49,0.023 -4.462,0.031 -4.434,0.038 -4.406,0.043 -4.377,0.047 -4.349,0.049 -4.32,0.05
  silkscreen extent -4.47,-3.4 4.47,-2.25
"HC-49S SMD" [mm] "SMD crystal resonator, ABL, ABLS, HC-49, HC49 11X4.5MM"
  oval 5x1.5 smd: 1(-4.953,0) 2(4.953,0)
  Top Layer pour cut-out: -5.715,1.524 5.715,1.524 5.715,-1.778 5.588,-1.651 -5.715,-1.651
  silkscreen extent -5.7,-2.4 5.7,2.4, body extent -6.4,-2.41 6.4,2.41, height 4.3
HDR_1X3 [mm] "Connector; Header; 3 Position"
  oval 1.4x2.2 / inner round 1.4 / far side oval 1.4x2.2 hole 1 mask+0.1: 1(-2.54,0) 2(0,0) 3(2.54,0)
  silkscreen extent -4.2,-1.7 3.84,1.3
HDR_1X4 [mm] "Connector; Header; 4 Position"
  oval 1.4x2.2 / inner round 1.4 / far side oval 1.4x2.2 hole 1 mask+0.1: 1(-3.81,0) 2(-1.27,0) 3(1.27,0)
  round 1.4 / inner round 1.4 / far side oval 1.4x2.2 hole 1 mask+0.1: 4(3.81,0)
  silkscreen extent -5.5,-1.7 5.11,1.3
HDR_1X5 [mm] "Connector; Header; 5 Position"
  oval 1.4x2.2 / inner round 1.4 / far side oval 1.4x2.2 hole 1 mask+0.1: 1(-5.08,0) 2(-2.54,0) 3(0,0) 4(2.54,0)
  round 1.4 / inner round 1.4 / far side oval 1.4x2.2 hole 1 mask+0.1: 5(5.08,0)
  silkscreen extent -6.8,-1.7 6.38,1.3
HDR_1X7 [mm] "Connector; Header; 7 Position"
  oval 1.4x2.2 / inner round 1.4 / far side oval 1.4x2.2 hole 1 mask+0.1: 1(-7.62,0) 2(-5.08,0) 3(-2.54,0) 4(0,0) 6(5.08,0)
  round 1.4 / inner round 1.4 / far side oval 1.4x2.2 hole 1 mask+0.1: 5(2.54,0) 7(7.62,0)
  silkscreen extent -9.3,-1.7 8.92,1.3
LED_0805_GREEN [mm] "LED SMD 0805, GREEN"
  rect 1x1.2 smd mask+0.075: 1(-1,0)
  rrect50% 1x1.2 smd mask+0.075: 2(1,0)
  Top Layer pour cut-out: -0.5,0.8 0.5,0.8 0.5,-0.8 -0.5,-0.8
  silkscreen extent -1.7,-0.8 1.8,0.8, body extent -1,-0.63 1,0.63, height 0.7
PHOENIX_1881574 [mm]
  rect 1.8x2.2 / inner round 1.8 / far side rect 1.8x1.8 hole 1.2: 01(2.2,3.9)
  oval 1.8x2.2 / inner round 1.8 / far side round 1.8 hole 1.2: 02(4.7,3.9) 03(7.2,3.9)
  round 1.8 hole 1.2: 04(9.7,3.9)
  silkscreen extent -0.75,0 11.9,8.1
QFP50P900X900X160-48N [mm]
  rrect50% 1.56x0.28 smd: 1(-4.18,2.75) 2(-4.18,2.25) 3(-4.18,1.75) 4(-4.18,1.25) 5(-4.18,0.75) 6(-4.18,0.25) 7(-4.18,-0.25) 8(-4.18,-0.75) 9(-4.18,-1.25) 10(-4.18,-1.75) 11(-4.18,-2.25) 12(-4.18,-2.75) 25(4.18,-2.75) 26(4.18,-2.25) 27(4.18,-1.75) 28(4.18,-1.25) 29(4.18,-0.75) 30(4.18,-0.25) 31(4.18,0.25) 32(4.18,0.75) 33(4.18,1.25) 34(4.18,1.75) 35(4.18,2.25) 36(4.18,2.75)
  rrect50% 0.28x1.56 smd: 13(-2.75,-4.18) 14(-2.25,-4.18) 15(-1.75,-4.18) 16(-1.25,-4.18) 17(-0.75,-4.18) 18(-0.25,-4.18) 19(0.25,-4.18) 20(0.75,-4.18) 21(1.25,-4.18) 22(1.75,-4.18) 23(2.25,-4.18) 24(2.75,-4.18) 37(2.75,4.18) 38(2.25,4.18) 39(1.75,4.18) 40(1.25,4.18) 41(0.75,4.18) 42(0.25,4.18) 43(-0.25,4.18) 44(-0.75,4.18) 45(-1.25,4.18) 46(-1.75,4.18) 47(-2.25,4.18) 48(-2.75,4.18)
  silkscreen extent -6.15,-3.6 3.6,3.6, body extent -4.5,-4.5 4.5,4.5, height 1.6
"RES 0805_2012" [mm] "Chip Resistor, 2-Leads, Body 2.00x1.25mm, IPC Medium Density"
  rect 1.15x1.35 smd: 1(-0.875,0) 2(0.875,0)
  silkscreen extent -1.62,-0.9 1.63,0.9, body extent -0.95,-0.62 1.05,0.63, height 0.6
SOD-523F [mm] "SODFL, 2-Leads, Body 0.80x1.60mm, IPC Medium Density"
  rect 0.8x0.5 smd: 1(-0.9,0) 2(0.9,0)
  silkscreen extent -1.6,-0.64 1.8,0.64, body extent -0.8,-0.4 0.8,0.4, height 0.65
SOIC127P600X180-16N [mm]
  rrect25% 1.31x0.62 smd: 1(-2.75,4.445) 2(-2.75,3.175) 3(-2.75,1.905) 4(-2.75,0.635) 5(-2.75,-0.635) 6(-2.75,-1.905) 7(-2.75,-3.175) 8(-2.75,-4.445) 9(2.75,-4.445) 10(2.75,-3.175) 11(2.75,-1.905) 12(2.75,-0.635) 13(2.75,0.635) 14(2.75,1.905) 15(2.75,3.175) 16(2.75,4.445)
  silkscreen extent -2.85,-5 1.78,5.85, body extent -3,-5 3,5, height 1.8
"SOIC-8 4.9X3.9MM P1.27MM" [mm] "SOIC, 8-Leads, Body 4.90x3.90mm, Pitch 1.27mm, IPC Medium Density"
  oval 1.45x0.6 smd: 1(-2.725,1.905) 2(-2.725,0.635) 3(-2.725,-0.635) 4(-2.725,-1.905) 5(2.725,-1.905) 6(2.725,-0.635) 7(2.725,0.635) 8(2.725,1.905)
  silkscreen extent -2.85,-2.5 1.6,2.88, body extent -3.01,-2.45 3.01,2.45, height 1.5
SOT23 [mm]
  rect 1x1.4 smd: 1(-0.95,-1.1) 2(0.95,-1.1) 3(0,1.1)
  silkscreen extent -1.42,-0.66 1.42,0.66
"SOT-223-4 6.5X7MM P2.3MM" [mm] "SOT223, 4-Leads, Body 6.50x7.00mm (avg), Pitch 2.30mm, IPC Medium Density"
  rect 1.6x1.2 smd: 1(-3.2,2.3) 2(-3.2,0) 3(-3.2,-2.3)
  rect 2x3.3 smd: 4(3.048,0)
  silkscreen extent -3.27,-3.35 1.85,3.72, body extent -3.52,-3.25 3.5,3.25, height 1.8
SWPBS_SPST_6X3X5 [mm] "SWITCH, PUSHBUTTON, SMD, SPST, 6X3.5mm, SKQMBBE010, 50000 Cycles, 1.57N Force"
  oval 2.2x1.6 smd mask+0.1: 1(-3.5,0) 2(3.5,0)
  silkscreen extent -3.1,-1.9 3.1,1.9, body extent -3.65,-1.75 3.65,1.75, height 5
SWPBT_SPDT_6X6X5SKHH [mm] "SWITCH, PUSHBUTTON, THD, SPDT, 6X6X5.0 mm Height ; 1,000,000 cycles ; 0.98N Force, SKHHAKA010"
  oval 2.4x1.6 hole 1 mask+0.1: 1(-3.2,2.3) 2(-3.2,-2.3) 3(3.2,-2.3) 4(3.2,2.3)
  silkscreen extent -3.1,-3.1 3.1,3.1, body extent -3.95,-3.1 3.95,3.1, height 5.03

## Part data
7seg: "file:///C:/Users/Tamana/Downloads/7SEG-12-19mm-GREEN-ANOD.pdf"
Boot0: library part HDR_1X3, "CONN, HEADER, Male, pitch: 2.54mm, 3POS"
Buzzer: "12 mm, 3.5 V, 85 dB, Through Hole, Magnetic Audio Transducer Buzzer", Package=None, Availability="In Stock", Check_prices=https://www.snapeda.com/parts/CEM-1203(42)/CUI+Devices/view-part/?ref=eda, CUI_purchase_URL=https://www.cuidevices.com/product/audio/buzzers/audio-transducers/cem-1203(42)?utm_source=snapeda.com&utm_medium=referral&utm_campaign=snapedaBOM, MF="CUI Devices", MP=CEM-1203(42), Price=None, Purchase-URL=https://pricing.snapeda.com/search/part/CEM-1203(42)/?ref=eda, SnapEDA_Link=https://www.snapeda.com/parts/CEM-1203(42)/CUI+Devices/view-part/?ref=snap
C1 C2 C5 C6 C14 C15 C16 C17 C18 C19 C20: library part "Cap 0805", "SMT Capacitor"
C3 C4 C7 C8 C9: library part LD051C182KAB2A, "COMMERCIAL CHIP STD JAPAN BULK - FN TAPE/REEL, 7 INCH PAPER TAPE-0805", Package=None, Availability=Unavailable, MP=LD051C182KAB2A, Price=None
D2 D3: library part "1N4148 (SMD)", "Diode Standard 75V 200mA Surface Mount SOD-523F", PartNumber=1N4148WT
I2C USART1: library part HDR_1X4, "CONN, HEADER, Male, pitch: 2.54mm, 4POS"
J1: Package=None, Availability=Unavailable, MP=USB4125-GF-A_REVA2, Price=None
keypad: library part HDR_1X7, "CONN, HEADER, Male, pitch: 2.54mm, 7POS"
MAX485: library part 1881574, Package=None, Availability=Unavailable, MF="{'manufacturer': u'Phoenix Contact'}", MP=1881574, Price=None
Q: "Bipolar _BJT_ Transistor NPN 40V 600mA 270MHz 350mW Surface Mount SOT-23-3", Package="TO-236-3 Taitron", Availability=Unavailable, MF=STMicroelectronics, MP=MMBT2222A, Price=None, SnapEDA_Link=https://www.snapeda.com/parts/MMBT2222A/STMicroelectronics/view-part/1642048/?ref=snap
R2 R3 R4 R7 R8 R9 R10 R11 R13 R14 R15 R17 R20 R65 R66 R67 R68 R69 R70 R71: library part "Res 0805", "SMT Resistor"
Reset: "Tactile Switch SPST-NO Top Actuated Surface Mount", PartNumber=FSMSMTR-ND
SWD: library part HDR_1X5, "CONN, HEADER, Male, pitch: 2.54mm, 5POS"
Switch: "Tactile Switch SPST-NO Top Actuated Surface Mount", PartNumber="PTS645SH50SMTR92 LFS"
U1: "ARM® Cortex®-M3 STM32F1 Microcontroller IC 32-Bit 72MHz 64KB (64K x 8) FLASH 48-LQFP (7x7)", Package="LQFP-48 STMicroelectronics", Check_prices=https://www.snapeda.com/parts/STM32F103C8T6/STMicroelectronics/view-part/?ref=eda, MF=STMicroelectronics, MP=STM32F103C8T6, SnapEDA_Link=https://www.snapeda.com/parts/STM32F103C8T6/STMicroelectronics/view-part/?ref=snap
U2: library part "LD1117-3.3V (SMD SOT-223)", "Linear Voltage Regulator IC  1 Output  800mA SOT-223", PartNumber=LD1117S33CTR
U3: "USB Interface Integrated Circuit", Package=None, Availability="Not in stock", Check_prices=https://www.snapeda.com/parts/Ch340G/WCH/view-part/?ref=eda, MF=WCH, MP=Ch340G, Price=None, SnapEDA_Link=https://www.snapeda.com/parts/Ch340G/WCH/view-part/?ref=snap
U8: library part "ADM485 (SMD)", "RS485 Interface", PartNumber=ADM4853ARZ-REEL7
Y2: library part "Crystal HC-49S SMD 8MHz", "SMT Crystal", PartNumber=ABLS-8.000MHZ-K4T

## Free pads (board coordinates)
  round 1.524 hole 3: 9(23.128,4.953) 9(42.94,63.881)

## Via types
v1: diameter 1.27, hole 0.711, Top Layer to Bottom Layer, 42 vias

## Nets (pads, with @x,y where several pads share a name; then routed paths per layer and width w, separated by ;. In a path a pad name is that pad's centre, name@x,y a point inside that pad or via, vN(x,y) a via of type N, cw(c..) or ccw(c..) an arc to the next point about the centre after c; other vN are vias at no path point)
3v3: Buzzer.P C5.2 C7.2 C8.2 C15.2 C16.2 C17.2 I2C.1 R4.2 R9.2 R10.2 R11.2 R14.1 R15.1 SWD.1 U1.9 U1.24 U1.36 U1.48 U2.2 U2.4 U3.4 USART1.1 | length 260.6
  Top Layer w0.254: v1(58.228,30.415) 58.228,30.378 62.127,26.479 62.127,25.757 v1(62.23,25.654)
  Top Layer w0.5: R10.2 82.423,48.221 83.478,49.276 87.249,49.276 88.138,48.387 88.138,40.386 87.63,39.878 I2C.1
  Top Layer w1: R4.2 R4.2@54.088,7.874 ; v1(54.483,21.844) 54.483,21.771 54.088,21.376 R4.2@54.088,7.874 ; v1(55.753,35.052) 55.753,37.846 v1@58.928,41.021 ; v1(56.261,7.874) R4.2@54.088,7.874 ; v1(57.531,53.213) 57.531,48.006 58.674,46.863 71.423,46.863 72.009,46.277 72.009,41.761 71.872,41.624 U2.2 71.772,34.913 71.772,33.479 71.313,33.02 ; v1@59.182,41.275 C8.2 74.83,41.275 74.957,41.148 C7.2 ; R15.1 66.726,34.709 66.726,33.555 67.388,32.893 74.485,32.893 74.56,32.968 74.751,32.968 v1(74.803,33.02) ; R9.2 82.523,40.287 82.598,40.212 82.598,40.112 83.058,39.652 83.058,36.957 ; SWD.1 83.644,23.749 83.058,24.335 v1(83.058,33.02) 83.058,36.957 ; I2C.1 83.058,36.957
  Bottom Layer w0.254: v1(55.753,35.052) 55.753,30.701 U1.48 57.679,30.69 57.953,30.415 v1(58.228,30.415) ; 56.134,23.241 56.653,23.76 U1.36 ; v1(58.801,41.148) 61.194,38.755 U1.9 ; v1(62.23,25.654) 62.499,25.654 62.963,25.19 U1.24 64.544,25.19 U1.24@64.654,25.08
  Bottom Layer w0.5: C5.2 55.492,58.364 55.492,56.141 U3.4 55.499,54.991 56.423,54.067 56.468,54.067 57.323,53.213 v1(57.531,53.213) ; U1.24@64.654,25.08 64.654,24.66 73.787,15.527 73.787,4.103 73.494,3.81 Buzzer.P
  Bottom Layer w1: R11.2 33.133,5.053 33.208,5.128 33.588,5.128 33.794,5.334 56.691,5.334 57.277,5.92 57.277,6.858 ; R14.1 47.556,35.35 47.556,36.634 52.005,41.083 52.987,41.083 ; C17.2 C16.2 C15.2@54.483,21.83 ; USART1.1 51.435,42.634 52.987,41.083 ; C15.2@54.723,21.83 56.134,23.241 ; v1(56.261,7.874) 57.277,6.858 ; v1(58.801,41.148) 58.749,41.096 58.558,41.096 58.545,41.083 52.987,41.083 ; Buzzer.P 60.325,3.81 57.277,6.858 ; v1(74.803,33.02) v1(83.058,33.02)
a: 7seg.4 U1.40 | length 22.8
  Bottom Layer w0.254: 7seg.4@35.223,27.714 35.223,25.93 35.371,25.781 52.585,25.781 53.494,26.69 U1.40
b: 7seg.5 U1.41 | length 19.4
  Bottom Layer w0.254: 7seg.5@37.763,27.714 37.763,27.072 38.151,26.684 38.151,26.619 38.481,26.289 52.451,26.289 53.306,27.144 55.019,27.144 55.052,27.177 55.751,27.177 U1.41
Boot0: Boot0.2 U1.44 | length 12.7
  Bottom Layer w0.254: Boot0.2 46.736,29.337 47.383,28.69 U1.44
c: 7seg.7 U1.28 | length 33.3
  Bottom Layer w0.254: 7seg.7@35.179,12.319 35.306,12.446 35.306,15.24 36.014,15.948 54.944,15.948 61.194,22.198 U1.28
C1: keypad.3 U1.19 | length 33.5
  Bottom Layer w0.254: U1.19 64.137,27.677 70.875,27.677 81.08,17.472 81.08,11.376 84.328,8.128 keypad.3
C2: keypad.2 U1.20 | length 35.1
  Bottom Layer w0.254: U1.20 70.473,27.19 80.391,17.272 80.391,9.906 84.498,5.799 85.768,5.799 keypad.2
C3: keypad.1 U1.21 | length 37.4
  Bottom Layer w0.254: U1.21 70.331,26.69 79.883,17.138 79.883,7.366 84.201,3.048 keypad.1
com: 7seg.8 R8.1 U1.29 | length 48.3
  Top Layer w0.254: 7seg.8@32.639,12.319 32.639,19.282 32.788,19.431 35.052,19.431 35.179,19.558 v1(35.433,19.558)
  Bottom Layer w0.254: 7seg.8@32.639,12.319 32.639,15.621 33.42,16.402 54.756,16.402 60.694,22.34 U1.29 ; R8.1 32.752,19.558 v1(35.433,19.558)
d: 7seg.9 U1.32 | length 37.2
  Bottom Layer w0.254: 7seg.9@30.099,12.319 30.099,15.748 31.207,16.856 54.568,16.856 59.194,21.482 U1.32
D+: J1.A5 U3.5 | length 5.4
  Bottom Layer w0.254: J1.A5 56.043,60.988 56.043,60.162 56.769,59.436 U3.5
D-: J1.B5 U3.6 | length 5.5
  Bottom Layer w0.254: J1.B5 57.059,60.972 57.059,60.162 58.039,59.182 U3.6
DP: 7seg.6 U1.27 | length 31
  Bottom Layer w0.254: 7seg.6@37.719,12.319 37.719,14.478 38.735,15.494 55.245,15.494 61.694,21.943 U1.27
e: 7seg.10 U1.33 | length 39.4
  Bottom Layer w0.254: 7seg.10@27.559,12.319 27.559,16.383 28.486,17.31 54.267,17.31 58.694,21.737 U1.33
f: 7seg.2 U1.39 | length 28.5
  Bottom Layer w0.254: 7seg.2@30.143,27.714 30.099,27.67 30.099,25.368 30.248,25.219 52.665,25.219 53.59,26.144 55.019,26.144 55.052,26.177 55.751,26.177 U1.39
g: 7seg.1 U1.38 | length 31.1
  Bottom Layer w0.254: 7seg.1@27.603,27.714 27.603,25.356 28.194,24.765 53.086,24.765 54.011,25.69 U1.38
GND: 3v3.2 C1.2 C2.2 C3.1 C4.1 C5.1 C6.1 C7.1 C8.1 C9.1 C14.1 C15.1 C16.1 C17.1 C18.1 C19.1 I2C.4 J1.A12 J1.B12 J1.S1 J1.S2 J1.S3 J1.S4 LED.2 MAX485.04 Q.2 R17.1 R71.1 Reset.1 SWD.5 Switch.2 Switch.3 U1.23 U1.35 U1.47 U2.1 U3.1 U8.5 USART1.4 | length 47
  Top Layer w0.254: v1(53.735,58.371) 53.848,58.258 53.848,57.15 ; v1(54.102,33.147) 54.229,33.274 54.229,48.3 54.102,48.427 54.102,54.737 54.229,54.864
  Bottom Layer w0.254: C17.1 49.786,20.215 48.79,20.215 48.641,20.364 48.641,21.971 47.984,22.628 47.984,22.838 48.387,23.241 49.276,23.241 49.657,22.86 54.39,22.86 56.041,24.511 56.261,24.511 56.406,24.656 56.552,24.656 56.719,24.823 57.545,24.823 57.694,24.674 U1.35 ; v1(54.102,33.147) 54.102,31.152 54.931,30.323 54.991,30.323 55.124,30.19 U1.47 ; C1.2 62.861,53.975 63.246,54.36 v1(63.246,56.007) ; U1.23 65.369,25.69 65.405,25.654
INC: R11.1 Switch.1 Switch.4 U1.26 | length 42
  Bottom Layer w0.254: R11.1 31.383,8.777 31.877,9.271 39.878,9.271 45.647,15.04 55.433,15.04 62.194,21.801 U1.26
LED: R7.1 U1.45 | length 49.6
  Top Layer w0.254: R7.1 40.527,9.793 51.308,20.574 51.308,37.697 52.197,38.586 v1(52.197,38.735)
  Bottom Layer w0.254: v1(52.197,38.735) 51.308,37.846 51.308,31.877 53.982,29.203 55.751,29.203 U1.45
Net3v3_1: 3v3.1 R15.2 | length 2.2
  Top Layer w1: 3v3.1 64.887,36.843 64.901,36.829 R15.2
Net7seg_3: 7seg.3 R8.2 | length 11.6
  Top Layer w0.254: 7seg.3@32.683,27.714 32.683,21.612 32.831,21.463 v1(35.306,21.463)
  Bottom Layer w0.254: R8.2 32.907,21.463 v1(35.306,21.463)
NetBoot0_1: Boot0.1 R14.2
NetBoot0_3: Boot0.3 R17.2
NetBuzzer_N: Buzzer.N Q.3 | length 7.6
  Bottom Layer w1: Q.3 70.153,7.071 70.739,7.657 Buzzer.N
NetC3_2: C3.2 C4.2 C6.2 C9.2 C18.2 C19.2 D2.2 MAX485.01 R2.1 R3.1 R65.2 R66.2 R67.2 R68.2 R69.2 U2.3 U3.16 U8.8 | length 112.6
  Top Layer w0.5: v1(48.514,59.436) 49.784,58.166 v1(49.784,54.102) ; U2.3 U2.3@74.211,35.052
  Top Layer w1: U2.3@74.211,35.052 C9.2 v1(78.74,35.052)
  Bottom Layer w0.5: R2.1 48.184,55.003 49.229,55.003 49.784,54.448 v1(49.784,54.102) ; R3.1@48.119,52.412 50.256,52.412 51.689,50.979 U3.16 ; D2.2 65.648,63.997 67.818,66.167 C4.2 ; U8.8 82.34,59.138 83.623,57.855 MAX485.01
  Bottom Layer w1: R3.1 47.976,52.684 47.976,55.123 R2.1 ; v1(48.514,59.436) 48.566,59.488 48.566,65.93 C18.2 48.702,66.066 48.702,66.47 49.288,67.056 67.232,67.056 67.818,66.47 67.818,66.167 ; C4.2 R68.2 R67.2 R66.2 R69.2 R65.2 72.524,54.593 72.524,52.341 C3.2 72.606,52.259 72.606,51.431 73.11,50.927 83.947,50.927 ; v1(78.74,35.052) 78.74,45.466 85.711,52.437 MAX485.01
NetC20_2: C20.2 U3.13 | length 2.5
  Bottom Layer w0.5: U3.13 55.506,50.627 55.506,48.111 C20.2
NetD2_1: D2.1 D3.2 | length 1.5
  Bottom Layer w0.5: D3.2@63.373,65.913 D2.1@64.897,65.913
NetD3_1: D3.1 J1.A9 J1.B9 | length 13.1
  Bottom Layer w0.5: J1.B9 54.868,62.826 55.161,63.119 58.42,63.119 ; J1.A9 57.908,62.607 58.42,63.119 ; 63.373,64.477 63.373,64.327 63.223,64.327 62.015,63.119 58.42,63.119
NetLED_1: LED.1 R7.2 | length 2.2
  Top Layer w1: R7.2 42.352,6.656 42.352,4.722 42.402,4.672 LED.1
NetMAX485_02: MAX485.02 R70.1 R71.2 U8.7 | length 12.7
  Bottom Layer w0.5: R71.2 80.641,57.033 80.641,61.089 81.137,61.585 83.83,61.585 84.811,60.604 85.462,60.604 MAX485.02 86.063,60.355 86.799,61.091 R70.1
NetMAX485_03: MAX485.03 R69.1 R70.2 U8.6 | length 17
  Top Layer w0.5: v1(75.937,57.032) 75.937,57.395 79.248,60.706 v1(79.248,61.214)
  Bottom Layer w0.5: R69.1 74.385,57.032 v1(75.937,57.032) ; v1(79.248,61.214) 79.502,61.214 81.143,62.855 U8.6 MAX485.03 85.718,62.848 88.244,62.848 R70.2
NetQ_1: Q.1 R20.2 | length 2.8
  Bottom Layer w1: Q.1 65.918,11.575 66.181,11.838 R20.2
NetR2_2: R2.2 RX.1 | length 2.4
  Bottom Layer w1: RX.1@46.244,57.519 46.369,57.394 46.369,55.266 R2.2
NetR3_2: R3.2 TX.1 | length 2.3
  Bottom Layer w0.5: R3.2@46.369,52.412 46.37,52.411 46.37,50.127 TX.1@46.371,50.126
NetR13_1: R13.1 TX.2 | length 2.6
  Bottom Layer w0.5: R13.1@48.133,47.586 48.252,47.705 48.252,50.007 TX.2@48.371,50.126
NetR13_2: R13.2 U1.31 U3.2 USART1.3 | length 49
  Top Layer w0.254: v1(53.213,47.879) 53.213,46.002 53.594,45.621 53.594,35.393 53.086,34.885 53.086,31.877 v1(58.293,26.67)
  Top Layer w0.5: v1(53.086,53.594) 52.959,53.467 52.959,48.133 v1(53.213,47.879)
  Bottom Layer w0.254: v1(58.293,26.67) 59.694,25.269 U1.31
  Bottom Layer w0.5: R13.2 46.27,46.186 46.609,45.847 48.876,45.847 ; USART1.3 46.355,43.326 48.876,45.847 ; U3.2 53.019,56.074 53.019,53.661 v1(53.086,53.594) ; v1(53.213,47.879) 50.908,47.879 48.876,45.847
NetR20_1: R20.1 U1.25 | length 14
  Bottom Layer w0.254: U1.25 62.694,17.863 62.674,17.844 67.673,12.845 67.673,12.196 R20.1
NetR65_1: R65.1 U1.13 U8.1 | length 38.1
  Top Layer w0.254: v1(76.821,54.356) 76.835,54.342 v1(76.835,48.768)
  Bottom Layer w0.254: U1.13 64.694,30.69 64.707,30.703 64.707,34.007 76.835,46.135 v1(76.835,48.768) ; R65.1 74.277,54.61 74.531,54.356 v1(76.821,54.356) 76.821,54.631 77.089,54.899 77.089,60.155 76.929,60.315 U8.1
NetR66_1: R66.1 R67.1 U1.14 U8.2 U8.3 | length 53.9
  Top Layer w0.254: v1(78.74,48.895) 78.74,57.912 80.772,59.944 80.772,64.814 80.623,64.962 79.564,64.962 v1(79.502,65.024)
  Bottom Layer w0.254: U1.14 64.137,30.203 65.51,30.203 65.659,30.352 65.659,33.909 78.74,46.99 v1(78.74,48.895) ; U8.3 78.222,62.855 79.502,64.135 v1(79.502,65.024)
  Bottom Layer w0.5: R66.1 R67.1 74.293,61.566 76.871,61.566 U8.2 U8.3
NetR68_1: R68.1 U1.12 U8.4 | length 51.8
  Top Layer w0.254: v1(68.072,64.262) 74.422,64.262 v1(76.962,66.802)
  Bottom Layer w0.254: U1.12 62.694,32.76 70.485,40.551 70.485,61.849 v1(68.072,64.262) ; R68.1 74.538,64.125 U8.4 76.962,64.197 v1(76.962,66.802)
NetRX_2: RX.2 U1.30 U3.3 USART1.2 | length 65.4
  Top Layer w0.254: USART1.2 48.895,44.361 51.562,47.028 v1@51.562,58.166 ; v1(51.689,58.293) 51.773,58.377 51.773,59.137 52.023,59.387 54.969,59.387 55.118,59.238 55.118,53.319 54.737,52.938 54.737,34.631 55.118,34.25 55.118,31.856 v1(60.325,26.649)
  Bottom Layer w0.254: U1.30 60.194,26.518 v1(60.325,26.649)
  Bottom Layer w0.5: RX.2 48.918,58.293 v1(51.689,58.293) ; U3.3 54.229,54.664 55.118,53.775 v1(55.118,53.594)
NRST: C14.2 C20.1 R4.1 Reset.2 SWD.4 U1.7 | length 99.3
  Top Layer w0.254: v1(52.324,35.56) 52.324,7.253 R4.1 ; v1(62.23,35.814) 62.103,35.941 57.912,35.941 v1(57.785,36.068) 57.785,35.941 57.785,33.02 59.817,30.988 73.13,30.988 73.19,30.928 73.593,30.928 v1(73.787,30.734)
  Top Layer w1: Reset.2 51.435,3.81 52.338,4.713 R4.1 52.333,7.244 50.537,7.244 C14.2
  Bottom Layer w0.254: v1(52.324,35.56) 52.529,35.56 52.981,36.012 55.276,36.012 55.332,36.068 v1(57.785,36.068) 60.194,33.659 U1.7 ; C20.1 57.711,47.656 57.711,46.81 62.23,42.291 v1(62.23,35.814) ; v1(73.787,30.734) 74.168,31.115 84.857,31.115 84.892,31.15 85.76,31.15 SWD.4
R1: keypad.7 U1.15 | length 26.6
  Bottom Layer w0.254: U1.15 72.164,29.69 80.645,21.209 83.566,18.288 keypad.7
R2: keypad.6 U1.16 | length 27.4
  Bottom Layer w0.254: U1.16 71.775,29.19 84.888,16.077 84.94,16.077 85.269,15.748 keypad.6
R3: keypad.5 U1.17 | length 30.3
  Bottom Layer w0.254: U1.17 71.513,28.69 82.169,18.034 82.169,14.605 83.566,13.208 keypad.5
R4: keypad.4 U1.18 | length 31.8
  Bottom Layer w0.254: U1.18 71.124,28.19 81.534,17.78 81.534,13.215 84.081,10.668 keypad.4
SCL: I2C.2 R9.1 U1.42 | length 41.6
  Top Layer w0.254: v1(61.468,28.575) 76.708,28.575 81.153,33.02 81.153,41.888 81.302,42.037 R9.1
  Top Layer w1: R9.1 82.523,42.037 82.904,42.418 I2C.2
  Bottom Layer w0.254: U1.42 60.075,27.69 61.109,28.724 61.258,28.575 v1(61.468,28.575)
SDA: I2C.3 R10.1 U1.43 | length 43.8
  Top Layer w0.254: v1(60.071,29.972) 64.521,29.972 65.41,29.083 76.454,29.083 80.645,33.274 80.645,43.294 82.323,44.972 R10.1
  Top Layer w1: R10.1 82.43,44.965 85.972,44.965 I2C.3
  Bottom Layer w0.254: U1.43 58.289,28.19 v1(60.071,29.972)
SWCLK: SWD.3 U1.37 | length 37.4
  Top Layer w0.254: v1(53.721,23.876) 53.794,23.949 73.987,23.949 v1(76.962,26.924)
  Bottom Layer w0.254: v1(53.721,23.876) 53.855,24.01 53.855,24.892 54.169,25.206 54.6,25.206 54.603,25.203 55.751,25.203 U1.37 ; v1(76.962,26.924) 78.867,28.829 SWD.3
SWDIO: SWD.2 U1.34 | length 35.2
  Top Layer w0.254: v1(56.495,20.975) 56.77,20.975 57.088,21.292 57.106,21.292 59.309,23.495 76.708,23.495 v1(78.74,25.527)
  Bottom Layer w0.254: v1(56.495,20.975) 58.194,22.674 U1.34 ; v1(78.74,25.527) 79.502,26.289 SWD.2
XI: C1.1 U3.7 Y2.2 | length 11.3
  Bottom Layer w0.5: U3.7 59.309,53.467 60.819,51.957 C1.1 66.213,51.957 66.675,51.495 Y2.2
XO: C2.1 U3.8 Y2.1 | length 9.3
  Bottom Layer w0.5: U3.8 60.579,56.479 61.828,57.728 62.804,57.728 C2.1 65.557,58.053 66.675,59.171 Y2.1
pads on no net: U1.1 U1.2 U1.3 U1.4 U1.5 U1.6 U1.8 U1.10 U1.11 U1.22 U1.46 U3.9 U3.10 U3.11 U3.12 U3.14 U3.15

## Polygon pours and split planes (outlines as drawn)
GND on Bottom Layer "GND_L02_P001" (solid, remove dead copper, pour order 1): 20.258,8.916 ccw(c22.25,4.681) 22.499,0.007 ccw(c22.536,0.129) 22.536,0.001 89.351,0.001 ccw(c89.351,0.129) 89.452,0.051 ccw(c88.998,1.446) 90.385,0.968 ccw(c90.265,1.009) 90.392,1.009 90.392,67.795 ccw(c90.265,67.795) 90.353,67.887 ccw(c88.95,67.459) 88.806,68.919 ccw(c88.716,68.829) 88.716,68.956 44.328,68.956 ccw(c44.275,68.84) 44.275,68.968 ccw(c44.265,63.633) 40.717,59.649 cw(c39.208,58.54) 41.081,58.54 cw(c39.208,58.54) 41.077,58.429 ccw(c41.205,58.421) 41.091,58.364 41.091,35.499 ccw(c41.218,35.499) 41.092,35.482 cw(c39.889,35.328) 41.102,35.328 cw(c39.889,35.328) 40.232,34.165 24.447,34.165 ccw(c24.447,34.038) 24.376,34.143 ccw(c24.337,33.031) 23.226,32.989 ccw(c23.311,32.895) 23.184,32.895 23.184,12.491 ccw(c23.302,12.444) 23.175,12.44 cw(c19.804,12.344) 23.176,12.344 cw(c19.804,12.344) 20.666,9.084 ccw(c20.693,8.959) 20.654,9.081 cw(c19.804,12.344) 20.362,9.018 ccw(c20.383,8.892)
GND on Top Layer "GND_L01_P000" (solid, remove dead copper, pour order 0): 20.201,8.915 ccw(c22.193,4.679) 22.442,0.005 ccw(c22.479,0.127) 22.479,0 89.295,0 ccw(c89.295,0.127) 89.396,0.05 ccw(c88.941,1.445) 90.329,0.966 ccw(c90.208,1.008) 90.336,1.008 90.336,67.794 ccw(c90.208,67.794) 90.297,67.885 ccw(c88.893,67.457) 88.749,68.918 ccw(c88.66,68.827) 88.66,68.955 44.272,68.955 ccw(c44.218,68.839) 44.219,68.966 ccw(c44.208,63.632) 40.66,59.648 cw(c39.152,58.538) 41.024,58.538 cw(c39.152,58.538) 41.021,58.428 ccw(c41.148,58.42) 41.034,58.362 41.034,35.498 ccw(c41.162,35.498) 41.036,35.481 cw(c39.832,35.327) 41.045,35.327 cw(c39.832,35.327) 40.175,34.164 24.39,34.164 ccw(c24.39,34.036) 24.319,34.142 ccw(c24.281,33.03) 23.169,32.987 ccw(c23.255,32.893) 23.127,32.893 23.127,12.49 ccw(c23.246,12.442) 23.118,12.439 cw(c19.747,12.343) 23.12,12.343 cw(c19.747,12.343) 20.61,9.082 ccw(c20.636,8.958) 20.598,9.079 cw(c19.747,12.343) 20.306,9.017 ccw(c20.327,8.891)

## Keep-outs
Keep-Out Layer:
  lines w0.254: 20.327,8.891 ccw(c19.747,12.343) 23.246,12.442 ; 20.636,8.958 ccw(c22.193,4.679) 22.479,0.135 ; 22.479,0.127 89.295,0.127 ; 23.255,12.343 23.255,32.893 ; 23.304,32.9 cw(c24.281,33.03) 24.39,34.009 ; 24.39,34.036 40.259,34.036 ; 40.193,34.036 ccw(c39.832,35.327) 41.162,35.498 41.162,58.674 ; 40.606,59.912 cw(c39.152,58.538) 41.148,58.42 ; 41.002,59.528 cw(c44.208,63.632) 44.218,68.839 ; 44.208,68.827 88.66,68.827 ; 88.722,68.787 cw(c88.893,67.457) 90.184,67.818 ; 89.302,0.154 ccw(c88.941,1.445) 90.208,1.008 90.208,67.794

## Other copper
Top Layer:
  pour cut-out: 63.373,31.369 63.414,31.328 63.414,24.641 56.735,24.641 56.636,24.74 56.642,24.746 56.642,31.369
Bottom Layer:
  rectangle net NetBoot0_3: 43.561,29.337 44.831,33.782
  rectangle net NetBoot0_1: 48.641,31.75 50.038,36.195
  rectangle net INC: 28.194,2.286 31.877,5.715
  rectangle net INC: 28.194,2.286 36.195,3.302
  pour cut-out: 54.49,57.268 52.595,57.268 52.24,56.913 52.24,56.711 54.425,56.711 54.483,56.769
  pour cut-out: 51.418,52.74 47.844,52.74 47.117,53.467 47.117,57.404 47.498,57.785 47.646,57.637 51.451,57.637
  pour cut-out: 77.926,59.962 77.978,60.014 77.978,62.611 76.581,62.611 76.581,59.949
  pour cut-out: 65.913,63.246 64.389,63.246 64.389,62.831 64.389,52.578 65.786,52.578 65.913,52.451
  pour cut-out: 56.261,34.163 51.943,34.163 51.562,34.544 51.689,34.671 51.689,37.084 56.388,37.084
  pour cut-out: 55.118,50.292 55.118,47.244 44.704,47.244 44.704,50.974 45.391,51.661 55.08,51.661
  pour cut-out: 60.198,51.435 59.938,51.695 50.973,51.695 50.972,55.754 60.198,55.752
  pour cut-out: 60.579,57.15 56.388,57.15 56.388,60.198 56.642,60.452 61.976,60.452 61.976,58.462 62.054,58.384
  pour cut-out: 63.373,31.369 63.414,31.328 63.414,24.641 56.735,24.641 56.636,24.74 56.642,24.746 56.642,31.369

## Silkscreen, mask and mechanical layers (free items; w line width, h text height)
Top Overlay:
  circle w0.254: c42.94,63.881 r1.8
  circle w0.254: c23.128,4.953 r1.8
  lines w0.1: 41.656,29.083 52.07,29.083
  lines w0.254: 61.406,3.721 ccw(c59.563,5.08) 61.424,6.414 ; 61.708,3.274 ccw(c59.972,5.073) 61.722,6.858 ; 62.086,2.938 ccw(c60.003,5.097) 62.103,7.239
  lines w0.3: 63.5,32.385 79.502,32.385 79.502,43.942 78.867,44.577 63.5,44.577 63.5,32.385
  lines w0.5: 58.293,4.191 58.928,4.191 60.198,2.921 60.833,2.921 60.833,6.985 60.198,6.985 59.055,5.842 58.293,5.842 58.293,4.191
  text "GND" at 89.169,63.593 h1.52 r90
  text "A" at 89.169,61.722 h1.52 r90
  text "B" at 89.169,59.421 h1.52 r90
  text "+5V" at 89.169,56.215 h1.52 r90
  text "Max485" at 89.259,50.238 h1.52 r90
  text "+5V to +3.3V" at 63.573,45.614 h1.52
  text "AMS1117" at 68.834,37.737 h1.52
  text "p-up" at 49.095,29.553 h1.52
  text "p-dn" at 41.726,29.449 h1.5
Bottom Overlay:
  lines w0.3: 55.372,1.524 55.372,3.302 ; 69.85,53.467 69.85,45.72 45.847,45.72 45.085,46.482 45.085,68.199 69.088,68.199 69.85,67.437 ; 70.866,53.086 70.866,51.054 71.501,50.419 89.916,50.419 89.916,67.564 89.281,68.199 70.866,68.199 70.866,67.31
  text "TX" at 47.228,39.863 h1.52
  text "RX" at 50.222,39.863 h1.52
  text "GND" at 44.627,39.826 h1.52
  text "3v3" at 52.733,39.826 h1.52
  text "GND" at 89.206,35.864 h1.52 r90
  text "NRST" at 89.206,32.766 h1.52 r90
  text "CLK" at 89.206,28.798 h1.52 r90
  text "DIO" at 89.206,25.861 h1.52 r90
  text "STM32f103C8T6" at 74.041,23.132 h1.52
  text "3v3" at 89.206,23.053 h1.52 r90
  text "R1" at 89.206,19.453 h1.52 r90
  text "R2" at 89.206,17.04 h1.52 r90
  text "R3" at 89.206,14.5 h1.52 r90
  text "R4" at 89.206,12.087 h1.52 r90
  text "C1" at 89.206,9.42 h1.52 r90
  text "C2" at 89.206,6.753 h1.52 r90
  text "C3" at 89.206,4.086 h1.52 r90
  text "tamana.amraji@gmail.com" at 54.862,1.929 h1.52
  text "Tamana Amraji" at 65.532,1.927 h1.52
  text "2025" at 82.169,1.923 h1.52

## Text inside footprints (layer, text, board x,y; h text height)
Buzzer: Top Overlay "+" at 73.66,1.207 h1.27 r90; Top Overlay "-" at 71.31,14.468 h1.27 r90